# Altium PCB STLINK_Breakout.PcbDoc
Units mm, origin at the board's own origin, x right, y up, seen from the top; angles counter-clockwise.
Board outline 25 x 20 mm, 2 copper layers (Top Layer, Bottom Layer); 2 components, 13 nets, 28 pads, 13 vias.
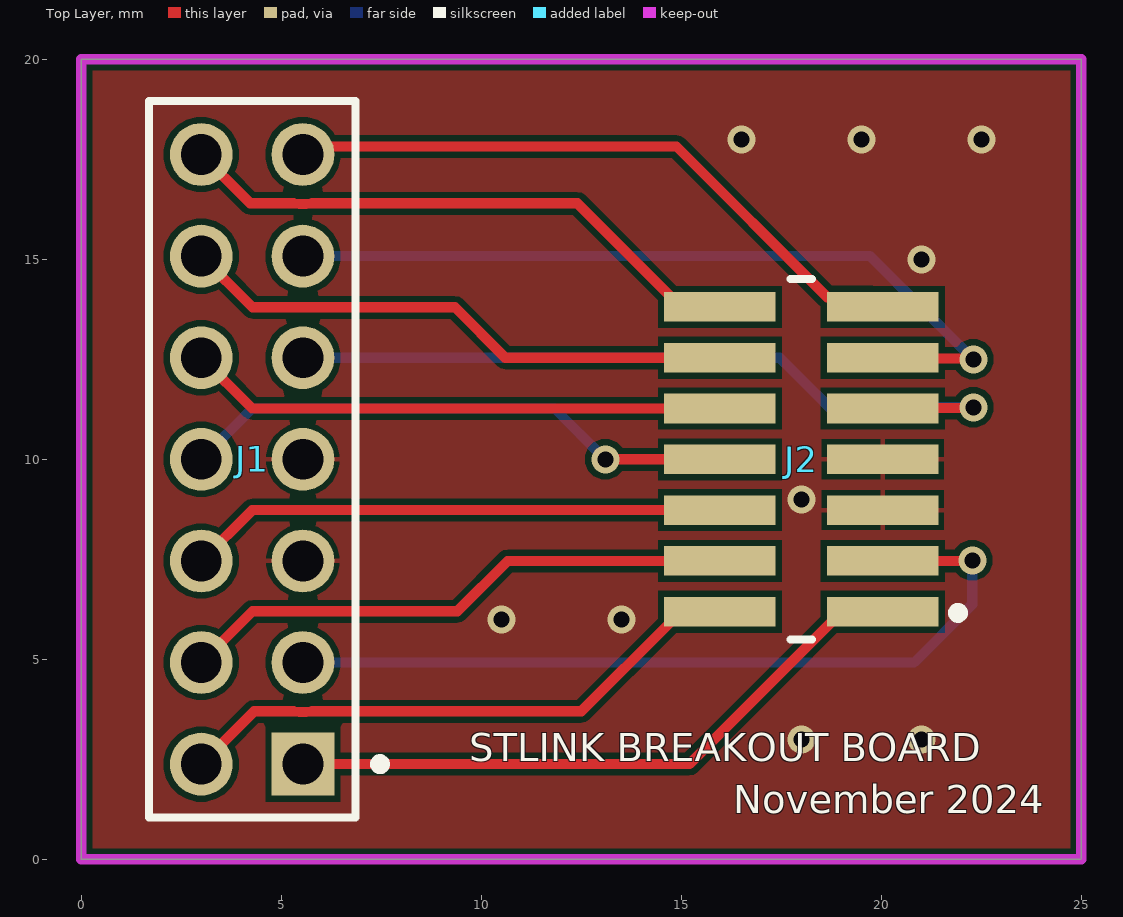
[diagram p0: Top Layer view]
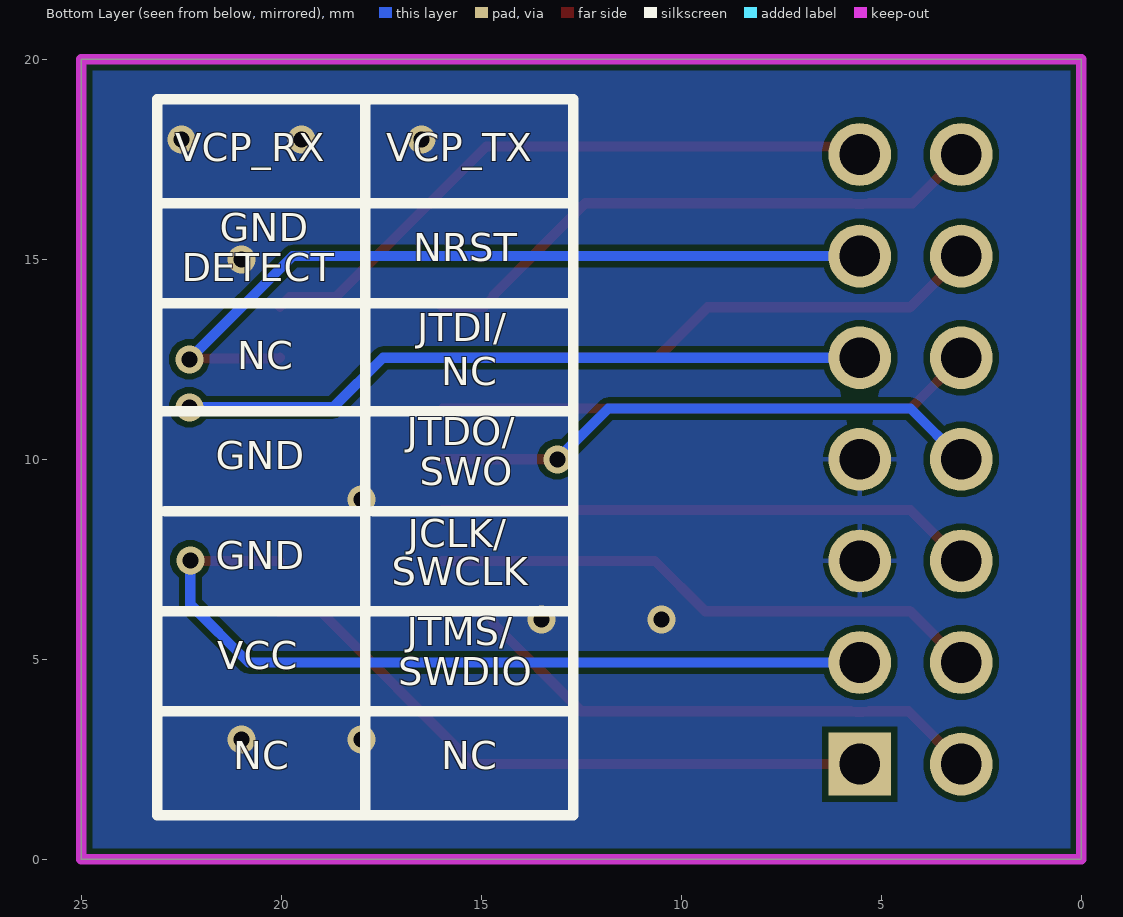
[diagram p1: Bottom Layer view, seen from below]

## Layer stack, top to bottom
Top Solder: solder mask 0.0102, Solder Resist, Dk 3.5
Top Layer: signal copper 0.0356
Dielectric 1: dielectric 0.32, FR-4, Dk 4.8
Bottom Layer: signal copper 0.0356
Bottom Solder: solder mask 0.0102, Solder Resist, Dk 3.5

## Board outline
0,0 25,0 25,20 0,20

## Design rules (kind name [scope] priority, off if disabled: settings)
BoardOutlineClearance [All] p1: gap=0.2 ignorepadtopadclearanceinfootprint=FALSE
Clearance [All] p1: gap=0.15 ignorepadtopadclearanceinfootprint=FALSE except(0.127: Arc-Text Track-Text SMDPad-Text THPad-Text Via-Text Fill-Text Poly-Text Region-Text Text-Text; 0.25: Arc-Hole Track-Hole SMDPad-Hole THPad-Hole Via-Hole Fill-Hole Poly-Hole Region-Hole Text-Hole; 0.275: Arc-Via Track-Via SMDPad-Via THPad-Via Via-Via; 0.33: Arc-THPad Track-THPad)
ComponentClearance [All] p1: gap=0.127 collisioncheckmode=3 verticalgap=0.127 showdistances=TRUE
DiffPairsRouting [All] p1: maxlimit=0.254 minlimit=0.127 mostfreqgap=0.127 toplayer_minwidth=0.127 toplayer_maxwidth=25.4 toplayer_prefwidth=0.127 bottomlayer_minwidth=0.127 bottomlayer_maxwidth=25.4 bottomlayer_prefwidth=0.127 maxuncoupledlength=12.7
Height [All] p1: minheight=0 maxheight=1816.048 prefheight=12.7
HoleSize [All] p1: absolutevalues=TRUE maxlimit=6.3 minlimit=0.3 maxpercent=80.000 minpercent=20.000
HoleToHoleClearance [All] p1: gap=0.3 allowstackedmicrovias=FALSE
MinimumAnnularRing [All] p1: minimumring=0.076
MinimumSolderMaskSliver [All] p1: minsoldermaskwidth=0
PlaneClearance [All] p1: clearance=0.127
PlaneConnect PlaneConnectPowerPads [InPadClass('PowerPads')] p1: planeconnectstyle=Direct reliefexpansion=0.508 reliefentries=4 reliefconductorwidth=0.254 reliefairgap=0.254
PlaneConnect [All] p2: pad.planeconnectstyle=Relief pad.reliefexpansion=0.3 pad.reliefentries=4 pad.reliefconductorwidth=0.127 pad.reliefairgap=0.127 via.planeconnectstyle=Direct via.reliefexpansion=0.3 via.reliefentries=4 via.reliefconductorwidth=0.127 via.reliefairgap=0.127
PolygonConnect PolygonConnectPowerPads [All vs (InPadClass('PowerPads'))] p1: connectstyle=Direct reliefconductorwidth=0.254 reliefentries=4 polygonreliefangle="90 Angle" airgapwidth=0.254
PolygonConnect [All] p2: thpad.connectstyle=Relief thpad.reliefconductorwidth=0.127 thpad.reliefentries=4 thpad.polygonreliefangle="90 Angle" thpad.airgapwidth=0.127 smdpad.connectstyle=Relief smdpad.reliefconductorwidth=0.127 smdpad.reliefentries=4 smdpad.polygonreliefangle="90 Angle" smdpad.airgapwidth=0.127 via.connectstyle=Direct via.reliefconductorwidth=0.127 via.reliefentries=4 via.polygonreliefangle="90 Angle" via.airgapwidth=0.127
RoutingVias [All] p1: holewidth=0.3 width=0.6 viastyle="Through Hole" minholewidth=0.3 minwidth=0.6 maxholewidth=0.6 maxwidth=6.6
SilkToSilkClearance [All] p1: silktosilkclearance=0
SilkToSolderMaskClearance [IsPad] p1: minsilkscreentomaskgap=0.127 clearancetoexposedcopper=TRUE
SolderMaskExpansion [All] p1: expansion=0.075 istentingtop=FALSE
Width [All] p1: maxlimit=25.4 minlimit=0.127 preferedwidth=0.127 minimp=50.000000 maximp=50.000000 favimp=50.000000
20 further rules are at their usual default settings.

## Components (designator, comment, footprint, x,y, rotation, side; value= is the part's Value field where it differs from the comment)
J1 "HTSW-107-07-G-D" FP-HTSW-107-07-G-D-MFG 4.27,10 r90 top
J2 "FTSH-107-01-L-DV-K" FP-FTSH-107-01-L-DV-K-MFG 18,10 r90 top

## Footprints (in the part's own frame and the unit in brackets; to place one, negate y for a bottom-side part, rotate by r counter-clockwise, add the part's x,y. Pads: shape width x height; smd on the part's side, far side on the other; paste and mask are expansions set on the pad)
FP-FTSH-107-01-L-DV-K-MFG [mm]
  rect 0.74x2.79 smd paste+0 mask+0: 1(-3.81,-2.035) 2(-3.81,2.035) 3(-2.54,-2.035) 4(-2.54,2.035) 5(-1.27,-2.035) 6(-1.27,2.035) 7(0,-2.035) 8(0,2.035) 9(1.27,-2.035) 10(1.27,2.035) 11(2.54,-2.035) 12(2.54,2.035) 13(3.81,-2.035) 14(3.81,2.035)
  silkscreen extent -4.51,-4.04 4.51,0.27, body extent -4.61,-3.53 4.61,3.53, height 0.25
FP-HTSW-107-07-G-D-MFG [mm]
  rect 1.57x1.57 hole 1.02 paste-2539.97 mask+0: 1(-7.62,-1.27)
  round 1.57 hole 1.02 paste-2539.97 mask+0: 2(-7.62,1.27) 3(-5.08,-1.27) 4(-5.08,1.27) 5(-2.54,-1.27) 6(-2.54,1.27) 7(0,-1.27) 8(0,1.27) 9(2.54,-1.27) 10(2.54,1.27) 11(5.08,-1.27) 12(5.08,1.27) 13(7.62,-1.27) 14(7.62,1.27)
  silkscreen extent -8.95,-3.32 8.95,2.58, body extent -9.05,-2.68 9.05,2.68, height 0.25

## Part data
J1: library part CMP-02766-001774-1, "CONN HEADER VERT 14POS 2.54MM", Flammability Rating="UL94 V-0", Housing Color=Natural, Max Current Rating=7A, Max Operating Temperature=125°C, Max Voltage Rating (AC)=550V, Min Operating Temperature=-55°C, Connector Type=Header, Contact Finish - Mating=GOLD, Contact Material=Bronze, Contact Plating=Gold, Contact Shape=Square, Contact Type="Male Pin", Depth=5.02mm, Fastening Type=Pull, Gender=Male, Housing Material=Polymer, Insulation Color=Natural, Insulation Material=Polymer, Length=17.78mm, Number of Contacts=14, Number of Positions=14, Number of Rows=2, Orientation=Straight, Packaging=Bag, Pitch=2.54mm, Reach SVHC Compliant=Yes, RoHS Compliant=Yes, Series=HTSW, Termination=Solder
J2: library part CMP-02766-001412-1, "CONN HEADER SMD 14POS 1.27MM", Housing Color=Black, Max Operating Temperature=125°C, Min Operating Temperature=-55°C, Contact Material=Bronze, Contact Plating=Gold, Depth=5.84mm, Gender=Male, Housing Material=Polymer, Lead Free="Lead Free", Length=8.89mm, Number of Contacts=14, Number of Rows=2, Orientation=Straight, Packaging=Rail/Tube, Pitch=1.27mm, Radiation Hardening=No, RoHS Compliant=Yes, Termination=Solder

## Via types
v1: diameter 0.7, hole 0.4, Top Layer to Bottom Layer, tented both sides, 13 vias

## Nets (pads, with @x,y where several pads share a name; then routed paths per layer and width w, separated by ;. In a path a pad name is that pad's centre, name@x,y a point inside that pad or via, vN(x,y) a via of type N, cw(c..) or ccw(c..) an arc to the next point about the centre after c; other vN are vias at no path point)
3V3: J1.3 J2.3 | length 20.7
  Top Layer w0.254: J2.3 22.26,7.46 v1(22.275,7.475) v1@22.3,7.5
  Bottom Layer w0.254: J1.3 20.82,4.92 22.275,6.375 v1(22.275,7.475)
GND: J1.5 J1.7 J2.5 J2.7
  other v1: 18,3 21,3 10.5,6 13.5,6 18,9 21,15 16.5,18 19.5,18 22.5,18
NetJ1_1: J1.1 J2.1 | length 16.1
  Top Layer w0.254: J1.1 15.2,2.38 19.01,6.19 J2.1
NetJ1_2: J1.2 J2.2 | length 14.6
  Top Layer w0.254: J1.2 4.32,3.7 5.307,3.7 ccw(c5.54,4.92) 5.773,3.7 12.5,3.7 14.697,5.897 14.697,5.947 14.94,6.19 J2.2
NetJ1_8: J1.8 J2.8 | length 14
  Top Layer w0.254: v1(13.1,10) J2.8
  Bottom Layer w0.254: J1.8 4.27,11.27 11.83,11.27 v1(13.1,10)
NetJ1_9: J1.9 J2.9 | length 19.6
  Top Layer w0.254: J2.9 20.05,11.285 22.285,11.285 v1(22.3,11.3)
  Bottom Layer w0.254: J1.9 17.46,12.54 18.7,11.3 v1(22.3,11.3)
NetJ1_10: J1.10 J2.10 | length 13.5
  Top Layer w0.254: J1.10 4.27,11.27 J2.10
NetJ1_11: J1.11 J2.11 | length 20.1
  Top Layer w0.254: J2.11 20.055,12.52 22.28,12.52 v1(22.3,12.5)
  Bottom Layer w0.254: J1.11 19.72,15.08 v1(22.3,12.5)
NRST: J1.12 J2.12 | length 14
  Top Layer w0.254: J1.12 4.28,13.8 9.34,13.8 10.6,12.54 J2.12
SWCLK: J1.6 J2.6 | length 13.5
  Top Layer w0.254: J1.6 4.27,8.73 J2.6
SWDIO: J1.4 J2.4 | length 14
  Top Layer w0.254: J1.4 4.28,6.2 9.4,6.2 10.66,7.46 J2.4
USART1_RX: J1.13 J2.13 | length 16.2
  Top Layer w0.254: J1.13 5.74,17.82 14.88,17.82 18.647,14.053 19.792,14.053 J2.13
USART1_TX: J1.14 J2.14 | length 14.6
  Top Layer w0.254: J1.14 4.146,16.474 4.22,16.4 5.307,16.4 ccw(c5.54,17.62) 5.773,16.4 12.4,16.4 12.474,16.326 14.697,14.103 14.697,14.053 14.94,13.81 J2.14

## Polygon pours and split planes (outlines as drawn)
GND on Top Layer "GND_L01_P000" (solid, pour order 0): 25,19.9 25,0 0,0 0,19.9
GND on Bottom Layer "GND_L02_P001" (solid, pour order 1): 25,19.9 25,0 0,0 0,19.9

## Keep-outs
Keep-Out Layer:
  the board outline again, w0.254

## Silkscreen, mask and mechanical layers (free items; w line width, h text height)
Top Overlay:
  text "STLINK BREAKOUT BOARD" at 9.7,2.213 h1.2
  text "November 2024" at 16.3,0.913 h1.2
Bottom Overlay:
  lines w0.254: 12.7,3.7 17.9,3.7 23.1,3.7 ; 12.7,8.7 17.7,8.7 ; 12.7,11.2 17.9,11.2 23.1,11.2 ; 12.7,13.9 17.9,13.9 23.1,13.9 ; 12.8,6.2 17.9,6.2 ; 12.8,16.4 17.9,16.4 ; 17.9,8.7 22.9,8.7 ; 18,6.2 23.1,6.2 ; 18,16.4 23.1,16.4 ; 17.9,1.1 17.9,19 ; 17.9,1.1 12.7,1.1 12.7,19 17.9,19 ; 17.9,1.1 17.9,19 ; 17.9,1.1 23.1,1.1 23.1,19 17.9,19
  text "VCP_TX" at 17.381,17.212 h1.2
  text "VCP_RX" at 22.649,17.212 h1.2
  text "GND" at 21.537,15.213 h1.2
  text "NRST" at 16.706,14.713 h1.2
  text "DETECT" at 22.491,14.213 h1.2
  text "JTDI/" at 16.599,12.713 h1.2
  text "NC" at 21.105,12.013 h1.2
  text "NC" at 16.005,11.613 h1.2
  text "JTDO/" at 16.867,10.113 h1.2
  text "GND" at 21.637,9.513 h1.2
  text "SWO" at 16.537,9.113 h1.2
  text "JCLK/" at 16.837,7.566 h1.2
  text "GND" at 21.637,7.013 h1.2
  text "SWCLK" at 17.241,6.613 h1.2
  text "JTMS/" at 16.867,5.113 h1.2
  text "VCC" at 21.603,4.513 h1.2
  text "SWDIO" at 17.072,4.113 h1.2
  text "NC" at 16.005,2.013 h1.2
  text "NC" at 21.205,2.013 h1.2